# EAGLE board orph_cryptostick-0v1-all (EAGLE 6.6.0), part 1 of 3
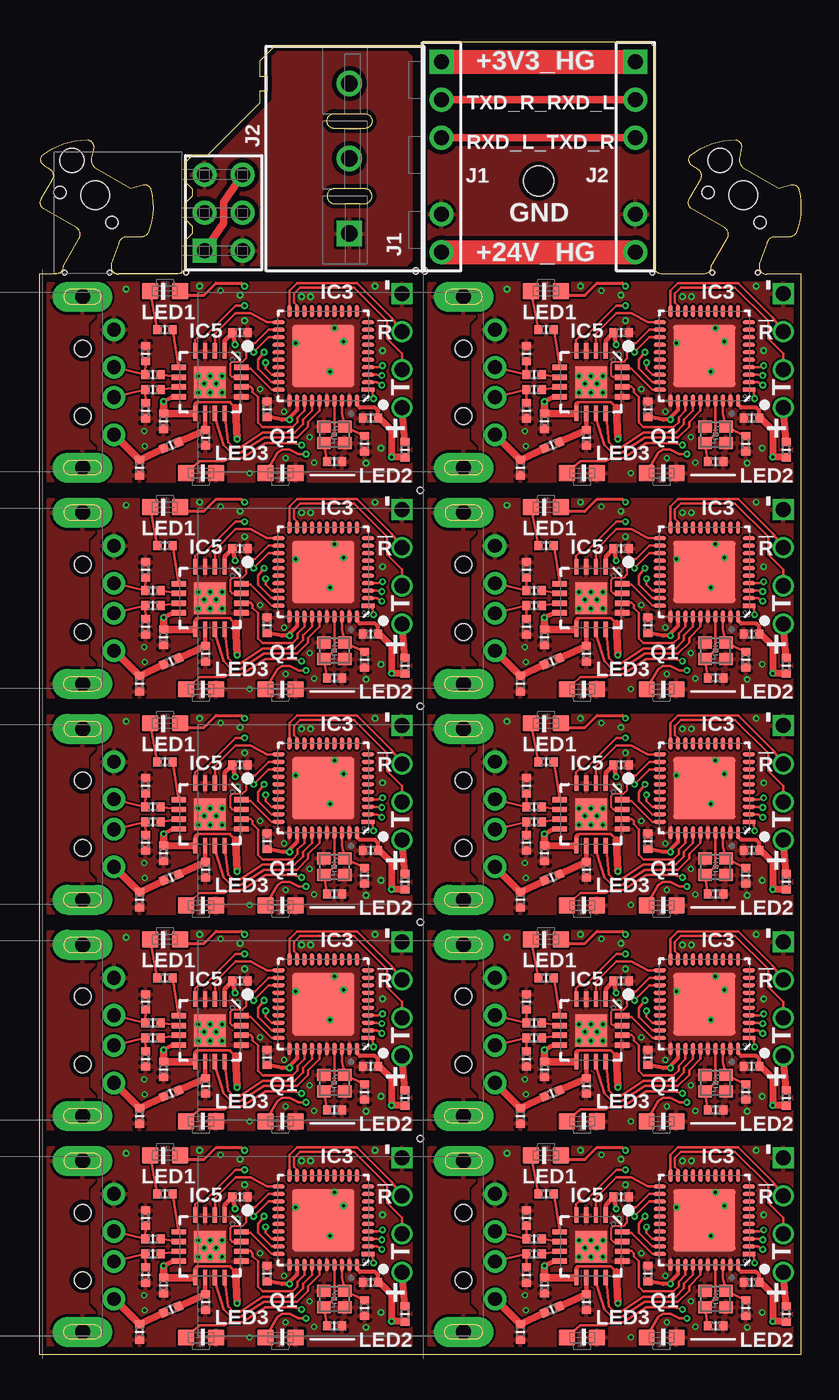
[diagram p0: board, top side]
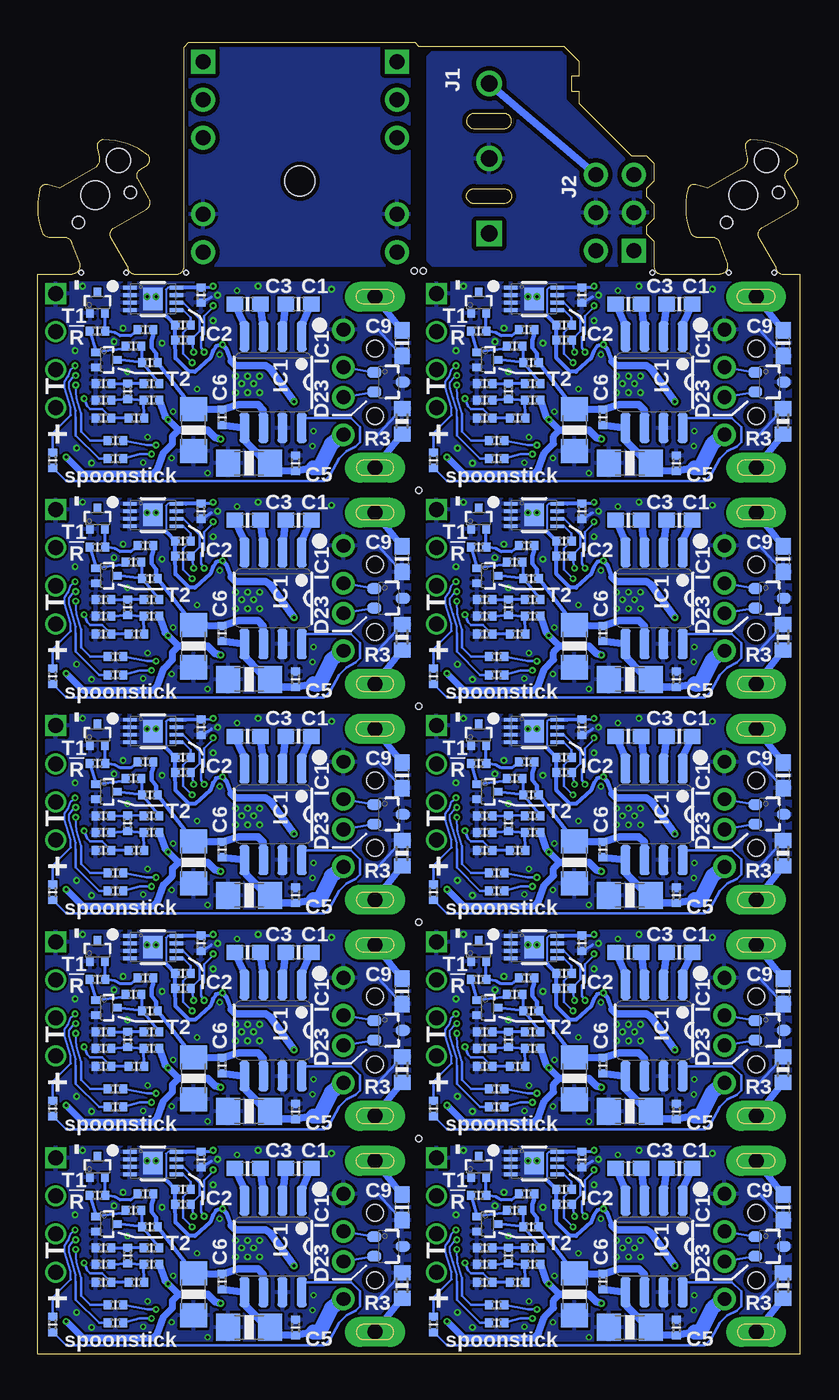
[diagram p1: board, bottom side, seen from below]

Size 50.8 x 87.44 mm. Coordinates in mm from the lower left corner, seen from the top.
Outline: 0,0 25.4,0 50.8,0 50.8,14.4 50.8,28.8 50.8,43.2 50.8,57.6 50.8,72 48.5,72 arc-90 48,72.5 48,72.7 48.51,74.04 arc-75 49.05,74.48 49.97,74.47 arc60 50.48,74.75 arc35 50.65,77.65 arc90 50.13,77.95 49.31,77.73 46.89,79.13 arc-60 46.7,79.82 46.83,80.44 arc90 46.44,80.95 arc40 43.39,79.88 arc90 43.58,79.2 43.92,79 arc-90 44.1,78.31 43.35,77.02 arc90 43.54,76.33 45.7,75.08 arc-90 45.89,74.4 44.8,72.5 arc-90 44.3,72 41.53,72 arc-90 41.03,72.5 41.03,87.12 40.71,87.44 25.64,87.44 25.4,87.2 15.7,87.2 14.7,86.2 14.7,85.2 15.2,85.2 15.2,84.2 14.7,84.2 14.7,83.4 11.2,79.9 10.2,79.9 9.7,79.4 9.7,78.2 10.2,77.7 10.2,77.2 9.7,76.7 9.7,75.7 10.2,75.2 10.2,74.7 9.7,74.2 9.7,72.5 arc-90 9.2,72 5.3,72 arc-90 4.8,72.5 4.8,72.7 5.31,74.04 arc-75 5.85,74.48 6.77,74.47 arc60 7.28,74.75 arc35 7.45,77.65 arc90 6.93,77.95 6.11,77.73 3.69,79.13 arc-60 3.5,79.82 3.63,80.44 arc90 3.24,80.95 arc40 0.19,79.88 arc90 0.38,79.2 0.72,79 arc-90 0.9,78.31 0.15,77.02 arc90 0.34,76.33 2.5,75.08 arc-90 2.69,74.4 1.6,72.5 arc-90 1.1,72 0,72 0,57.6 0,43.2 0,28.8 0,14.4 0,0
Outline: 21.7,76.7 arc180 21.7,77.7 19.7,77.7 arc180 19.7,76.7 21.7,76.7
Outline: 21.7,81.7 19.7,81.7 arc-180 19.7,82.7 21.7,82.7 arc-180 21.7,81.7
Copper layers (1*16): Top 0.035mm / dielectric 1.5mm / Bottom 0.035mm
Design rules "PCB-POOL HighSpec *": minimum track width 0.125mm, minimum drill 0.2mm, track to track 0.125mm, track to pad 0.125mm, pad to pad 0.125mm, via to via 0.125mm, smd to smd 0.125mm, copper to edge 0.3mm, drill to drill 0.2mm, minimum pad ring 0.2mm, minimum via ring 0.1mm, stop-mask expansion 0.075mm, vias tented up to drill 0mil, thermal gap 0.2mm
Holes 1.9 mm at 46.95,77.25 3.75,77.25
Holes 1.6 mm at 45.41,79.58 2.21,79.58
Holes 0.8 mm at 44.59,77.46 48.05,75.46 1.39,77.46 4.85,75.46
Holes 2 mm at 33.3,78.2
Holes 0.3 mm at 40.9,72.1 9.8,72.1 44.9,72.1 47.9,72.1 1.7,72.1 4.7,72.1
Holes 0.4 mm at 25.1,72.2 25.7,72.2 25.4,57.6 25.4,43.2 25.4,28.8 25.4,14.4

## Footprints (pad centres in the part's own frame; a part is rotated, then mirrored left to right if it is on the bottom)
C0603 = smd 1.1 x 1: 1 -0.85,0; 2 0.85,0
R0402-MCU = smd 0.54 x 0.6: 1 -0.51,0; 2 0.51,0
C1206 = smd 1.6 x 1.8: 1 -1.4,0; 2 1.4,0
SC70-3 = smd 0.7 x 0.9: 1 -0.65,-0.95; 2 0.65,-0.95; 3 0,0.95
8SOIC-2 = smd 0.66 x 2: 1 -1.905,-3.05; 2 -0.635,-3.05; 3 0.635,-3.05; 4 1.905,-3.05; 5 1.905,3.05; 6 0.635,3.05; 7 -0.635,3.05; 8 -1.905,3.05
8UDFN = smd 0.9 x 0.25: 1 -1.55,0.75; 2 -1.55,0.25; 3 -1.55,-0.25; 4 -1.55,-0.75; 5 1.55,-0.75; 6 1.55,-0.25; 7 1.55,0.25; 8 1.55,0.75 | smd 1.3 x 1.5: EP 0,0
40VQFN-MSP430FR5959 = smd 0.85 x 0.28: 1 -2.975,2.25; 2 -2.975,1.75; 3 -2.975,1.25; 4 -2.975,0.75; 5 -2.975,0.25; 6 -2.975,-0.25; 7 -2.975,-0.75; 8 -2.975,-1.25; 9 -2.975,-1.75; 10 -2.975,-2.25; 21 2.975,-2.25; 22 2.975,-1.75; 23 2.975,-1.25; 24 2.975,-0.75; 25 2.975,-0.25; 26 2.975,0.25; 27 2.975,0.75; 28 2.975,1.25; 29 2.975,1.75; 30 2.975,2.25 | smd 0.28 x 0.85: 11 -2.25,-2.975; 12 -1.75,-2.975; 13 -1.25,-2.975; 14 -0.75,-2.975; 15 -0.25,-2.975; 16 0.25,-2.975; 17 0.75,-2.975; 18 1.25,-2.975; 19 1.75,-2.975; 20 2.25,-2.975; 31 2.25,2.975; 32 1.75,2.975; 33 1.25,2.975; 34 0.75,2.975; 35 0.25,2.975; 36 -0.25,2.975; 37 -0.75,2.975; 38 -1.25,2.975; 39 -1.75,2.975; 40 -2.25,2.975 | smd 4.15 x 4.15: EP 0,0
16QFN-FT230X = smd 1 x 0.325: 1 -2.08,0.975; 2 -2.08,0.325; 3 -2.08,-0.325; 4 -2.08,-0.975; 9 2.08,-0.975; 10 2.08,-0.325; 11 2.08,0.325; 12 2.08,0.975 | smd 0.325 x 1: 5 -0.975,-2.08; 6 -0.325,-2.08; 7 0.325,-2.08; 8 0.975,-2.08; 13 0.975,2.08; 14 0.325,2.08; 15 -0.325,2.08; 16 -0.975,2.08 | smd 2.1 x 2.1: EP 0,0
USB-A-ST = drill 0.92 pad 1.5: 1 3.5,4.8; 2 1,4.8; 3 -1,4.8; 4 -3.5,4.8 | drill 1 pad 2 long: SH1 5.7,2.7; SH2 -5.7,2.7 | hole 1.1: -2.25,2.7; 2.25,2.7
KLEMME-FEDER-5MM-3POS = drill 1.1 pad 1.7 square: 1 -5,-0.3 | drill 1.1 pad 1.7: 2 0,-0.3; 3 5,-0.3
FE04-1 = drill 1 pad 1.4 square: 1 -3.81,0 | drill 1 pad 1.4: 2 -1.27,0; 3 1.27,0; 4 3.81,0
FE03-2-R/A = drill 1 pad 1.6 square: 1 1.27,2.54 | drill 1 pad 1.6: 2 -1.27,2.54; 3 1.27,0; 4 -1.27,0; 5 1.27,-2.54; 6 -1.27,-2.54
MA06-1-KEY = drill 1 pad 1.6 square: 1 0,6.35 | drill 1 pad 1.6: 2 0,3.81; 3 0,1.27; 5 0,-3.81; 6 0,-6.35
0603-SIDELED-RPI = smd 1.1 x 1.1: A -1,0.235; C 1,0.235
XTAL-30MHZ-2.0X1.6 = smd 0.9 x 0.8: 1 -0.7,-0.55; 2 0.7,-0.55; 3 0.7,0.55; 4 -0.7,0.55
R0603 = smd 1 x 1.1: 1 -0.85,0; 2 0.85,0
SOT523 = smd 0.5 x 0.61: 1 -0.5,-0.7; 2 0.5,-0.7; 3 0,0.7

## Placement (x,y rotation side)
C1  0u22  [C0603]  8,12.4 180 bottom
C2  0u1  [R0402-MCU]  14.5,13 270 bottom
C3  0u22  [C0603]  11.4,12.4 180 bottom
C4  0u1  [R0402-MCU]  13.1,4.85 270 bottom
C5  10u/1206  [C1206]  11.3,1.8 180 bottom
C6  10u/1206  [C1206]  15,4 270 bottom
C7  0u1  [R0402-MCU]  8.2,1.8 90 bottom
C8  22p  [R0402-MCU]  19.7,1.9 180 top
C9  10n_nm  [C0603]  1.1,9.8 90 bottom
C10  0u1  [R0402-MCU]  15.2,5.4 90 top
C11  22p  [R0402-MCU]  21.7,3.1 90 top
C12  0u1  [R0402-MCU]  22.1,4.8 180 top
C13  10n  [R0402-MCU]  6.7,1.5 270 top
C14  47p  [R0402-MCU]  7.1,23.5 90 top
C15  47p  [R0402-MCU]  7.1,19.7 270 top
C16  0u1  [R0402-MCU]  11.1,17.9 270 top
C17  0u1  [R0402-MCU]  8.3,19 270 top
C18  0u1  [R0402-MCU]  13.4,24.9 0 top
C19  0u1  [R0402-MCU]  14.5,27.4 270 bottom
C20  0u1  [R0402-MCU]  21.4,25 0 bottom
C21  0u1  [R0402-MCU]  19.4,21 90 bottom
C22  100p  [R0402-MCU]  21,19.2 180 bottom
C23  0u22  [C0603]  8,26.8 180 bottom
C24  0u22  [C0603]  11.4,26.8 180 bottom
C25  0u1  [R0402-MCU]  13.1,19.25 270 bottom
C26  10u/1206  [C1206]  11.3,16.2 180 bottom
C27  10u/1206  [C1206]  15,18.4 270 bottom
C28  0u1  [R0402-MCU]  8.2,16.2 90 bottom
C29  22p  [R0402-MCU]  19.7,16.3 180 top
C30  0u1  [R0402-MCU]  19.4,6.6 90 bottom
C31  0u1  [R0402-MCU]  21.4,10.6 0 bottom
C32  100p  [R0402-MCU]  21,4.8 180 bottom
C33  0u1  [R0402-MCU]  22.1,19.2 180 top
C34  0u1  [R0402-MCU]  15.2,19.8 90 top
C35  22p  [R0402-MCU]  21.7,17.5 90 top
C36  10n_nm  [C0603]  1.1,24.2 90 bottom
C37  10n  [R0402-MCU]  6.7,15.9 270 top
C38  47p  [R0402-MCU]  7.1,37.9 90 top
C39  47p  [R0402-MCU]  7.1,34.1 270 top
C40  0u1  [R0402-MCU]  11.1,32.3 270 top
C41  0u1  [R0402-MCU]  8.3,33.4 270 top
C42  0u1  [R0402-MCU]  13.4,39.3 0 top
C43  0u1  [R0402-MCU]  14.5,41.8 270 bottom
C44  0u1  [R0402-MCU]  21.4,39.4 0 bottom
C45  0u1  [R0402-MCU]  19.4,35.4 90 bottom
C46  100p  [R0402-MCU]  21,33.6 180 bottom
C47  0u22  [C0603]  8,41.2 180 bottom
C48  0u22  [C0603]  11.4,41.2 180 bottom
C49  0u1  [R0402-MCU]  13.1,33.65 270 bottom
C50  10u/1206  [C1206]  11.3,30.6 180 bottom
C51  10u/1206  [C1206]  15,32.8 270 bottom
C52  0u1  [R0402-MCU]  8.2,30.6 90 bottom
C53  22p  [R0402-MCU]  19.7,30.7 180 top
C54  0u1  [R0402-MCU]  22.1,33.6 180 top
C55  0u1  [R0402-MCU]  15.2,34.2 90 top
C56  22p  [R0402-MCU]  21.7,31.9 90 top
C57  10n_nm  [C0603]  1.1,38.6 90 bottom
C58  10n  [R0402-MCU]  6.7,30.3 270 top
C59  47p  [R0402-MCU]  7.1,52.3 90 top
C60  47p  [R0402-MCU]  7.1,48.5 270 top
C61  0u1  [R0402-MCU]  11.1,46.7 270 top
C62  0u1  [R0402-MCU]  8.3,47.8 270 top
C63  0u1  [R0402-MCU]  13.4,53.7 0 top
C64  0u1  [R0402-MCU]  14.5,56.2 270 bottom
C65  0u1  [R0402-MCU]  21.4,53.8 0 bottom
C66  0u1  [R0402-MCU]  19.4,49.8 90 bottom
C67  100p  [R0402-MCU]  21,48 180 bottom
C68  0u22  [C0603]  8,55.6 180 bottom
C69  0u22  [C0603]  11.4,55.6 180 bottom
C70  0u1  [R0402-MCU]  13.1,48.05 270 bottom
C71  10u/1206  [C1206]  11.3,45 180 bottom
C72  10u/1206  [C1206]  15,47.2 270 bottom
C73  0u1  [R0402-MCU]  8.2,45 90 bottom
C74  22p  [R0402-MCU]  19.7,45.1 180 top
C75  0u1  [R0402-MCU]  22.1,48 180 top
C76  0u1  [R0402-MCU]  15.2,48.6 90 top
C77  22p  [R0402-MCU]  21.7,46.3 90 top
C78  10n_nm  [C0603]  1.1,53 90 bottom
C79  10n  [R0402-MCU]  6.7,44.7 270 top
C80  47p  [R0402-MCU]  7.1,66.7 90 top
C81  47p  [R0402-MCU]  7.1,62.9 270 top
C82  0u1  [R0402-MCU]  11.1,61.1 270 top
C83  0u1  [R0402-MCU]  8.3,62.2 270 top
C84  0u1  [R0402-MCU]  13.4,68.1 0 top
C85  0u1  [R0402-MCU]  14.5,70.6 270 bottom
C86  0u1  [R0402-MCU]  21.4,68.2 0 bottom
C87  0u1  [R0402-MCU]  19.4,64.2 90 bottom
C88  100p  [R0402-MCU]  21,62.4 180 bottom
C89  0u22  [C0603]  8,70 180 bottom
C90  47p  [R0402-MCU]  7.1,5.3 270 top
C91  47p  [R0402-MCU]  7.1,9.1 90 top
C92  0u1  [R0402-MCU]  11.1,3.5 270 top
C93  0u1  [R0402-MCU]  8.3,4.6 270 top
C94  0u1  [R0402-MCU]  13.4,10.5 0 top
C95  0u22  [C0603]  11.4,70 180 bottom
C96  0u1  [R0402-MCU]  13.1,62.45 270 bottom
C97  10u/1206  [C1206]  11.3,59.4 180 bottom
C98  10u/1206  [C1206]  15,61.6 270 bottom
C99  0u1  [R0402-MCU]  8.2,59.4 90 bottom
C100  22p  [R0402-MCU]  19.7,59.5 180 top
C101  0u1  [R0402-MCU]  22.1,62.4 180 top
C102  0u1  [R0402-MCU]  15.2,63 90 top
C103  22p  [R0402-MCU]  21.7,60.7 90 top
C104  10n_nm  [C0603]  1.1,67.4 90 bottom
C105  10n  [R0402-MCU]  6.7,59.1 270 top
C106  47p  [R0402-MCU]  32.5,9.1 90 top
C107  47p  [R0402-MCU]  32.5,5.3 270 top
C108  0u1  [R0402-MCU]  36.5,3.5 270 top
C109  0u1  [R0402-MCU]  33.7,4.6 270 top
C110  0u1  [R0402-MCU]  38.8,10.5 0 top
C111  0u1  [R0402-MCU]  39.9,13 270 bottom
C112  0u1  [R0402-MCU]  46.8,10.6 0 bottom
C113  0u1  [R0402-MCU]  44.8,6.6 90 bottom
C114  100p  [R0402-MCU]  46.4,4.8 180 bottom
C115  0u22  [C0603]  33.4,12.4 180 bottom
C116  0u22  [C0603]  36.8,12.4 180 bottom
C117  0u1  [R0402-MCU]  38.5,4.85 270 bottom
C118  10u/1206  [C1206]  36.7,1.8 180 bottom
C119  10u/1206  [C1206]  40.4,4 270 bottom
C120  0u1  [R0402-MCU]  33.6,1.8 90 bottom
C121  22p  [R0402-MCU]  45.1,1.9 180 top
C122  0u1  [R0402-MCU]  47.5,4.8 180 top
C123  0u1  [R0402-MCU]  40.6,5.4 90 top
C124  22p  [R0402-MCU]  47.1,3.1 90 top
C125  10n_nm  [C0603]  26.5,9.8 90 bottom
C126  10n  [R0402-MCU]  32.1,1.5 270 top
C127  47p  [R0402-MCU]  32.5,23.5 90 top
C128  47p  [R0402-MCU]  32.5,19.7 270 top
C129  0u1  [R0402-MCU]  36.5,17.9 270 top
C130  0u1  [R0402-MCU]  33.7,19 270 top
C131  0u1  [R0402-MCU]  38.8,24.9 0 top
C132  0u1  [R0402-MCU]  39.9,27.4 270 bottom
C133  0u1  [R0402-MCU]  46.8,25 0 bottom
C134  0u1  [R0402-MCU]  44.8,21 90 bottom
C135  100p  [R0402-MCU]  46.4,19.2 180 bottom
C136  0u22  [C0603]  33.4,26.8 180 bottom
C137  0u22  [C0603]  36.8,26.8 180 bottom
C138  0u1  [R0402-MCU]  38.5,19.25 270 bottom
C139  10u/1206  [C1206]  36.7,16.2 180 bottom
C140  10u/1206  [C1206]  40.4,18.4 270 bottom
C141  0u1  [R0402-MCU]  33.6,16.2 90 bottom
C142  22p  [R0402-MCU]  45.1,16.3 180 top
C143  0u1  [R0402-MCU]  47.5,19.2 180 top
C144  0u1  [R0402-MCU]  40.6,19.8 90 top
C145  22p  [R0402-MCU]  47.1,17.5 90 top
C146  10n_nm  [C0603]  26.5,24.2 90 bottom
C147  10n  [R0402-MCU]  32.1,15.9 270 top
C148  47p  [R0402-MCU]  32.5,37.9 90 top
C149  47p  [R0402-MCU]  32.5,34.1 270 top
C150  0u1  [R0402-MCU]  36.5,32.3 270 top
C151  0u1  [R0402-MCU]  33.7,33.4 270 top
C152  0u1  [R0402-MCU]  38.8,39.3 0 top
C153  0u1  [R0402-MCU]  39.9,41.8 270 bottom
C154  0u1  [R0402-MCU]  46.8,39.4 0 bottom
C155  0u1  [R0402-MCU]  44.8,35.4 90 bottom
C156  100p  [R0402-MCU]  46.4,33.6 180 bottom
C157  0u22  [C0603]  33.4,41.2 180 bottom
C158  0u22  [C0603]  36.8,41.2 180 bottom
C159  0u1  [R0402-MCU]  38.5,33.65 270 bottom
C160  10u/1206  [C1206]  36.7,30.6 180 bottom
C161  10u/1206  [C1206]  40.4,32.8 270 bottom
C162  0u1  [R0402-MCU]  33.6,30.6 90 bottom
C163  22p  [R0402-MCU]  45.1,30.7 180 top
C164  0u1  [R0402-MCU]  47.5,33.6 180 top
C165  0u1  [R0402-MCU]  40.6,34.2 90 top
C166  22p  [R0402-MCU]  47.1,31.9 90 top
C167  10n_nm  [C0603]  26.5,38.6 90 bottom
C168  10n  [R0402-MCU]  32.1,30.3 270 top
C169  47p  [R0402-MCU]  32.5,52.3 90 top
C170  47p  [R0402-MCU]  32.5,48.5 270 top
C171  0u1  [R0402-MCU]  36.5,46.7 270 top
C172  0u1  [R0402-MCU]  33.7,47.8 270 top
C173  0u1  [R0402-MCU]  38.8,53.7 0 top
C174  0u1  [R0402-MCU]  39.9,56.2 270 bottom
C175  0u1  [R0402-MCU]  46.8,53.8 0 bottom
C176  0u1  [R0402-MCU]  44.8,49.8 90 bottom
C177  100p  [R0402-MCU]  46.4,48 180 bottom
C178  0u22  [C0603]  33.4,55.6 180 bottom
C179  0u22  [C0603]  36.8,55.6 180 bottom
C180  0u1  [R0402-MCU]  38.5,48.05 270 bottom
C181  10u/1206  [C1206]  36.7,45 180 bottom
C182  10u/1206  [C1206]  40.4,47.2 270 bottom
C183  0u1  [R0402-MCU]  33.6,45 90 bottom
C184  22p  [R0402-MCU]  45.1,45.1 180 top
C185  0u1  [R0402-MCU]  47.5,48 180 top
C186  0u1  [R0402-MCU]  40.6,48.6 90 top
C187  22p  [R0402-MCU]  47.1,46.3 90 top
C188  10n_nm  [C0603]  26.5,53 90 bottom
C189  10n  [R0402-MCU]  32.1,44.7 270 top
C190  47p  [R0402-MCU]  32.5,66.7 90 top
C191  47p  [R0402-MCU]  32.5,62.9 270 top
C192  0u1  [R0402-MCU]  36.5,61.1 270 top
C193  0u1  [R0402-MCU]  33.7,62.2 270 top
C194  0u1  [R0402-MCU]  38.8,68.1 0 top
C195  0u1  [R0402-MCU]  39.9,70.6 270 bottom
C196  0u1  [R0402-MCU]  46.8,68.2 0 bottom
C197  0u1  [R0402-MCU]  44.8,64.2 90 bottom
C198  100p  [R0402-MCU]  46.4,62.4 180 bottom
C199  0u22  [C0603]  33.4,70 180 bottom
C200  0u22  [C0603]  36.8,70 180 bottom
C201  0u1  [R0402-MCU]  38.5,62.45 270 bottom
C202  10u/1206  [C1206]  36.7,59.4 180 bottom
C203  10u/1206  [C1206]  40.4,61.6 270 bottom
C204  0u1  [R0402-MCU]  33.6,59.4 90 bottom
C205  22p  [R0402-MCU]  45.1,59.5 180 top
C206  0u1  [R0402-MCU]  47.5,62.4 180 top
C207  0u1  [R0402-MCU]  40.6,63 90 top
C208  22p  [R0402-MCU]  47.1,60.7 90 top
C209  10n_nm  [C0603]  26.5,67.4 90 bottom
C210  10n  [R0402-MCU]  32.1,59.1 270 top
D1  TVS-ESD7002  [SC70-3]  2,21.6 270 bottom
D2  TVS-ESD7002  [SC70-3]  2,36 270 bottom
D3  TVS-ESD7002  [SC70-3]  2,50.4 270 bottom
D4  TVS-ESD7002  [SC70-3]  2,64.8 270 bottom
D5  TVS-ESD7002  [SC70-3]  27.4,7.2 270 bottom
D6  TVS-ESD7002  [SC70-3]  27.4,21.6 270 bottom
D7  TVS-ESD7002  [SC70-3]  27.4,36 270 bottom
D8  TVS-ESD7002  [SC70-3]  27.4,50.4 270 bottom
D9  TVS-ESD7002  [SC70-3]  27.4,64.8 270 bottom
D23  TVS-ESD7002  [SC70-3]  2,7.2 270 bottom
IC1  ST662-2  [8SOIC-2]  9.7,7.2 180 bottom
IC2  ATECC508A-UDFN  [8UDFN]  17.7,12.75 0 bottom
IC3  MSP430FR5959-40VQFN  [40VQFN-MSP430FR5959]  18.95,8.95 180 top
IC4  FT230XQ  [16QFN-FT230X]  11.4,21.6 270 top
IC5  FT230XQ  [16QFN-FT230X]  11.4,7.2 270 top
IC6  ATECC508A-UDFN  [8UDFN]  17.7,27.15 0 bottom
IC7  MSP430FR5959-40VQFN  [40VQFN-MSP430FR5959]  18.95,23.35 180 top
IC8  ST662-2  [8SOIC-2]  9.7,21.6 180 bottom
IC9  FT230XQ  [16QFN-FT230X]  11.4,36 270 top
IC10  ATECC508A-UDFN  [8UDFN]  17.7,41.55 0 bottom
IC11  MSP430FR5959-40VQFN  [40VQFN-MSP430FR5959]  18.95,37.75 180 top
IC12  ST662-2  [8SOIC-2]  9.7,36 180 bottom
IC13  FT230XQ  [16QFN-FT230X]  11.4,50.4 270 top
IC14  ATECC508A-UDFN  [8UDFN]  17.7,55.95 0 bottom
IC15  MSP430FR5959-40VQFN  [40VQFN-MSP430FR5959]  18.95,52.15 180 top
IC16  ST662-2  [8SOIC-2]  9.7,50.4 180 bottom
IC17  FT230XQ  [16QFN-FT230X]  11.4,64.8 270 top
IC18  ATECC508A-UDFN  [8UDFN]  17.7,70.35 0 bottom
IC19  MSP430FR5959-40VQFN  [40VQFN-MSP430FR5959]  18.95,66.55 180 top
IC20  ST662-2  [8SOIC-2]  9.7,64.8 180 bottom
IC21  FT230XQ  [16QFN-FT230X]  36.8,7.2 270 top
IC22  ATECC508A-UDFN  [8UDFN]  43.1,12.75 0 bottom
IC23  MSP430FR5959-40VQFN  [40VQFN-MSP430FR5959]  44.35,8.95 180 top
IC24  ST662-2  [8SOIC-2]  35.1,7.2 180 bottom
IC25  FT230XQ  [16QFN-FT230X]  36.8,21.6 270 top
IC26  ATECC508A-UDFN  [8UDFN]  43.1,27.15 0 bottom
IC27  MSP430FR5959-40VQFN  [40VQFN-MSP430FR5959]  44.35,23.35 180 top
IC28  ST662-2  [8SOIC-2]  35.1,21.6 180 bottom
IC29  FT230XQ  [16QFN-FT230X]  36.8,36 270 top
IC30  ATECC508A-UDFN  [8UDFN]  43.1,41.55 0 bottom
IC31  MSP430FR5959-40VQFN  [40VQFN-MSP430FR5959]  44.35,37.75 180 top
IC32  ST662-2  [8SOIC-2]  35.1,36 180 bottom
IC33  FT230XQ  [16QFN-FT230X]  36.8,50.4 270 top
IC34  ATECC508A-UDFN  [8UDFN]  43.1,55.95 0 bottom
IC35  MSP430FR5959-40VQFN  [40VQFN-MSP430FR5959]  44.35,52.15 180 top
IC36  ST662-2  [8SOIC-2]  35.1,50.4 180 bottom
IC37  FT230XQ  [16QFN-FT230X]  36.8,64.8 270 top
IC38  ATECC508A-UDFN  [8UDFN]  43.1,70.35 0 bottom
IC39  MSP430FR5959-40VQFN  [40VQFN-MSP430FR5959]  44.35,66.55 180 top
IC40  ST662-2  [8SOIC-2]  35.1,64.8 180 bottom
J1  USB-A-ST  [USB-A-ST]  0.2,7.2 270 top
J2  KLEMME-3POS-FEDER-5MM  [KLEMME-FEDER-5MM-3POS]  20.4,79.7 90 top
J3  FE04-1  [FE04-1]  24.2,9.3 270 top
J4  FE03-2  [FE03-2-R/A]  12.3,76.09 180 top
J5  MA06-1-KEY  [MA06-1-KEY]  26.84,79.82 0 top
J6  MA06-1-KEY  [MA06-1-KEY]  39.76,79.82 0 top
J7  USB-A-ST  [USB-A-ST]  0.2,21.6 270 top
J8  FE04-1  [FE04-1]  24.2,23.7 270 top
J9  USB-A-ST  [USB-A-ST]  0.2,36 270 top
J10  FE04-1  [FE04-1]  24.2,38.1 270 top
J11  USB-A-ST  [USB-A-ST]  0.2,50.4 270 top
J12  FE04-1  [FE04-1]  24.2,52.5 270 top
J13  USB-A-ST  [USB-A-ST]  0.2,64.8 270 top
J14  FE04-1  [FE04-1]  24.2,66.9 270 top
J15  USB-A-ST  [USB-A-ST]  25.6,7.2 270 top
J16  FE04-1  [FE04-1]  49.6,9.3 270 top
J17  USB-A-ST  [USB-A-ST]  25.6,21.6 270 top
J18  FE04-1  [FE04-1]  49.6,23.7 270 top
J19  USB-A-ST  [USB-A-ST]  25.6,36 270 top
J20  FE04-1  [FE04-1]  49.6,38.1 270 top
J21  USB-A-ST  [USB-A-ST]  25.6,50.4 270 top
J22  FE04-1  [FE04-1]  49.6,52.5 270 top
J23  USB-A-ST  [USB-A-ST]  25.6,64.8 270 top
J24  FE04-1  [FE04-1]  49.6,66.9 270 top
L1  [R0402-MCU]  8.8,3 22.5 top
L2  [R0402-MCU]  8.8,17.4 22.5 top
L3  [R0402-MCU]  8.8,31.8 22.5 top
L4  [R0402-MCU]  8.8,46.2 22.5 top
L5  [R0402-MCU]  8.8,60.6 22.5 top
L6  [R0402-MCU]  34.2,3 22.5 top
L7  [R0402-MCU]  34.2,17.4 22.5 top
L8  [R0402-MCU]  34.2,31.8 22.5 top
L9  [R0402-MCU]  34.2,46.2 22.5 top
L10  [R0402-MCU]  34.2,60.6 22.5 top
LED1  green  [0603-SIDELED-RPI]  8.4,13.5 180 top
LED2  green  [0603-SIDELED-RPI]  16.1,0.9 0 top
LED3  orange  [0603-SIDELED-RPI]  10.8,0.9 0 top
LED4  green  [0603-SIDELED-RPI]  8.4,27.9 180 top
LED5  green  [0603-SIDELED-RPI]  16.1,15.3 0 top
LED6  orange  [0603-SIDELED-RPI]  10.8,15.3 0 top
LED7  green  [0603-SIDELED-RPI]  8.4,42.3 180 top
LED8  green  [0603-SIDELED-RPI]  16.1,29.7 0 top
LED9  orange  [0603-SIDELED-RPI]  10.8,29.7 0 top
LED10  green  [0603-SIDELED-RPI]  8.4,56.7 180 top
LED11  green  [0603-SIDELED-RPI]  16.1,44.1 0 top
LED12  orange  [0603-SIDELED-RPI]  10.8,44.1 0 top
LED13  green  [0603-SIDELED-RPI]  8.4,71.1 180 top
LED14  green  [0603-SIDELED-RPI]  16.1,58.5 0 top
LED15  orange  [0603-SIDELED-RPI]  10.8,58.5 0 top
LED16  green  [0603-SIDELED-RPI]  33.8,13.5 180 top
LED17  green  [0603-SIDELED-RPI]  41.5,0.9 0 top
LED18  orange  [0603-SIDELED-RPI]  36.2,0.9 0 top
LED19  green  [0603-SIDELED-RPI]  33.8,27.9 180 top
LED20  green  [0603-SIDELED-RPI]  41.5,15.3 0 top
LED21  orange  [0603-SIDELED-RPI]  36.2,15.3 0 top
LED22  green  [0603-SIDELED-RPI]  33.8,42.3 180 top
LED23  green  [0603-SIDELED-RPI]  41.5,29.7 0 top
LED24  orange  [0603-SIDELED-RPI]  36.2,29.7 0 top
LED25  green  [0603-SIDELED-RPI]  33.8,56.7 180 top
LED26  green  [0603-SIDELED-RPI]  41.5,44.1 0 top
LED27  orange  [0603-SIDELED-RPI]  36.2,44.1 0 top
LED28  green  [0603-SIDELED-RPI]  33.8,71.1 180 top
LED29  green  [0603-SIDELED-RPI]  41.5,58.5 0 top
LED30  orange  [0603-SIDELED-RPI]  36.2,58.5 0 top
Q1  [XTAL-30MHZ-2.0X1.6]  19.7,3.7 180 top
Q2  [XTAL-30MHZ-2.0X1.6]  19.7,18.1 180 top
Q3  [XTAL-30MHZ-2.0X1.6]  19.7,32.5 180 top
Q4  [XTAL-30MHZ-2.0X1.6]  19.7,46.9 180 top
Q5  [XTAL-30MHZ-2.0X1.6]  19.7,61.3 180 top
Q6  [XTAL-30MHZ-2.0X1.6]  45.1,3.7 180 top
Q7  [XTAL-30MHZ-2.0X1.6]  45.1,18.1 180 top
Q8  [XTAL-30MHZ-2.0X1.6]  45.1,32.5 180 top
Q9  [XTAL-30MHZ-2.0X1.6]  45.1,46.9 180 top
Q10  [XTAL-30MHZ-2.0X1.6]  45.1,61.3 180 top
R1  3k9  [R0402-MCU]  15.7,11 0 bottom
R2  4k7  [R0402-MCU]  24.4,2 90 bottom
R3  1M_nm  [R0603]  1.1,4.6 270 bottom
R4  3k9  [R0402-MCU]  15.7,10 0 bottom
R5  68  [R0402-MCU]  24.4,2.7 90 top
R6  1k  [R0402-MCU]  20.2,2.1 180 bottom
R7  1k  [R0402-MCU]  20.2,3.3 180 bottom
R8  27  [R0402-MCU]  7.6,21.1 180 top
R9  27  [R0402-MCU]  7.6,22.1 180 top
R10  1k  [R0402-MCU]  8.4,25.1 180 top
R11  3k9  [R0402-MCU]  15.7,25.4 0 bottom
R12  3k9  [R0402-MCU]  15.7,24.4 0 bottom
R13  100k  [R0402-MCU]  18.2,25.1 0 bottom
R14  1M  [R0402-MCU]  19,24 180 bottom
R15  10k  [R0402-MCU]  17.9,22.9 180 bottom
R16  33k  [R0402-MCU]  17.8,20.4 180 bottom
R17  33k  [R0402-MCU]  21,20.4 180 bottom
R18  33k  [R0402-MCU]  17.8,21.5 180 bottom
R19  10k  [R0402-MCU]  21,21.5 180 bottom
R20  33k  [R0402-MCU]  18.8,19.2 180 bottom
R21  4k7  [R0402-MCU]  24.4,16.4 90 bottom
R22  1M_nm  [R0603]  1.1,19 270 bottom
R23  68  [R0402-MCU]  24.4,17.1 90 top
R24  1k  [R0402-MCU]  20.2,16.5 180 bottom
R25  1k  [R0402-MCU]  20.2,17.7 180 bottom
R26  27  [R0402-MCU]  7.6,35.5 180 top
R27  27  [R0402-MCU]  7.6,36.5 180 top
R28  1k  [R0402-MCU]  8.4,39.5 180 top
R29  3k9  [R0402-MCU]  15.7,39.8 0 bottom
R30  3k9  [R0402-MCU]  15.7,38.8 0 bottom
R31  100k  [R0402-MCU]  18.2,39.5 0 bottom
R32  1M  [R0402-MCU]  19,38.4 180 bottom
R33  100k  [R0402-MCU]  18.2,10.7 0 bottom
R34  1M  [R0402-MCU]  19,9.6 180 bottom
R35  10k  [R0402-MCU]  17.9,8.5 180 bottom
R36  33k  [R0402-MCU]  17.8,6 180 bottom
R37  33k  [R0402-MCU]  21,6 180 bottom
R38  33k  [R0402-MCU]  17.8,7.1 180 bottom
R39  10k  [R0402-MCU]  21,7.1 180 bottom
R40  33k  [R0402-MCU]  18.8,4.8 180 bottom
R41  10k  [R0402-MCU]  17.9,37.3 180 bottom
R42  33k  [R0402-MCU]  17.8,34.8 180 bottom
R43  33k  [R0402-MCU]  21,34.8 180 bottom
R44  33k  [R0402-MCU]  17.8,35.9 180 bottom
R45  10k  [R0402-MCU]  21,35.9 180 bottom
R46  33k  [R0402-MCU]  18.8,33.6 180 bottom
R47  4k7  [R0402-MCU]  24.4,30.8 90 bottom
R48  1M_nm  [R0603]  1.1,33.4 270 bottom
R49  68  [R0402-MCU]  24.4,31.5 90 top
R50  1k  [R0402-MCU]  20.2,30.9 180 bottom
R51  1k  [R0402-MCU]  20.2,32.1 180 bottom
R52  27  [R0402-MCU]  7.6,49.9 180 top
R53  27  [R0402-MCU]  7.6,50.9 180 top
R54  1k  [R0402-MCU]  8.4,53.9 180 top
R55  3k9  [R0402-MCU]  15.7,54.2 0 bottom
R56  3k9  [R0402-MCU]  15.7,53.2 0 bottom
R57  100k  [R0402-MCU]  18.2,53.9 0 bottom
R58  1M  [R0402-MCU]  19,52.8 180 bottom
R59  10k  [R0402-MCU]  17.9,51.7 180 bottom
R60  33k  [R0402-MCU]  17.8,49.2 180 bottom
R61  33k  [R0402-MCU]  21,49.2 180 bottom
R62  33k  [R0402-MCU]  17.8,50.3 180 bottom
R63  10k  [R0402-MCU]  21,50.3 180 bottom
R64  33k  [R0402-MCU]  18.8,48 180 bottom
R65  4k7  [R0402-MCU]  24.4,45.2 90 bottom
R66  1M_nm  [R0603]  1.1,47.8 270 bottom
R67  68  [R0402-MCU]  24.4,45.9 90 top
R68  1k  [R0402-MCU]  20.2,45.3 180 bottom
R69  1k  [R0402-MCU]  20.2,46.5 180 bottom
R70  27  [R0402-MCU]  7.6,64.3 180 top
R71  27  [R0402-MCU]  7.6,65.3 180 top
R72  1k  [R0402-MCU]  8.4,68.3 180 top
R73  3k9  [R0402-MCU]  15.7,68.6 0 bottom
R74  27  [R0402-MCU]  7.6,7.7 180 top
R75  27  [R0402-MCU]  7.6,6.7 180 top
R76  1k  [R0402-MCU]  8.4,10.7 180 top
R77  3k9  [R0402-MCU]  15.7,67.6 0 bottom
R78  100k  [R0402-MCU]  18.2,68.3 0 bottom
R79  1M  [R0402-MCU]  19,67.2 180 bottom
R80  10k  [R0402-MCU]  17.9,66.1 180 bottom
R81  33k  [R0402-MCU]  17.8,63.6 180 bottom
R82  33k  [R0402-MCU]  21,63.6 180 bottom
R83  33k  [R0402-MCU]  17.8,64.7 180 bottom
R84  10k  [R0402-MCU]  21,64.7 180 bottom
R85  33k  [R0402-MCU]  18.8,62.4 180 bottom
R86  4k7  [R0402-MCU]  24.4,59.6 90 bottom
R87  1M_nm  [R0603]  1.1,62.2 270 bottom
R88  68  [R0402-MCU]  24.4,60.3 90 top
R89  1k  [R0402-MCU]  20.2,59.7 180 bottom
R90  1k  [R0402-MCU]  20.2,60.9 180 bottom
R91  27  [R0402-MCU]  33,6.7 180 top
R92  27  [R0402-MCU]  33,7.7 180 top
R93  1k  [R0402-MCU]  33.8,10.7 180 top
R94  3k9  [R0402-MCU]  41.1,11 0 bottom
R95  3k9  [R0402-MCU]  41.1,10 0 bottom
R96  100k  [R0402-MCU]  43.6,10.7 0 bottom
R97  1M  [R0402-MCU]  44.4,9.6 180 bottom
R98  10k  [R0402-MCU]  43.3,8.5 180 bottom
R99  33k  [R0402-MCU]  43.2,6 180 bottom
R100  33k  [R0402-MCU]  46.4,6 180 bottom
R101  33k  [R0402-MCU]  43.2,7.1 180 bottom
R102  10k  [R0402-MCU]  46.4,7.1 180 bottom
R103  33k  [R0402-MCU]  44.2,4.8 180 bottom
R104  4k7  [R0402-MCU]  49.8,2 90 bottom
R105  1M_nm  [R0603]  26.5,4.6 270 bottom
R106  68  [R0402-MCU]  49.8,2.7 90 top
R107  1k  [R0402-MCU]  45.6,2.1 180 bottom
R108  1k  [R0402-MCU]  45.6,3.3 180 bottom
R109  27  [R0402-MCU]  33,21.1 180 top
R110  27  [R0402-MCU]  33,22.1 180 top
R111  1k  [R0402-MCU]  33.8,25.1 180 top
R112  3k9  [R0402-MCU]  41.1,25.4 0 bottom
R113  3k9  [R0402-MCU]  41.1,24.4 0 bottom
R114  100k  [R0402-MCU]  43.6,25.1 0 bottom
R115  1M  [R0402-MCU]  44.4,24 180 bottom
R116  10k  [R0402-MCU]  43.3,22.9 180 bottom
R117  33k  [R0402-MCU]  43.2,20.4 180 bottom
R118  33k  [R0402-MCU]  46.4,20.4 180 bottom
R119  33k  [R0402-MCU]  43.2,21.5 180 bottom
R120  10k  [R0402-MCU]  46.4,21.5 180 bottom
R121  33k  [R0402-MCU]  44.2,19.2 180 bottom
R122  4k7  [R0402-MCU]  49.8,16.4 90 bottom
R123  1M_nm  [R0603]  26.5,19 270 bottom
R124  68  [R0402-MCU]  49.8,17.1 90 top
R125  1k  [R0402-MCU]  45.6,16.5 180 bottom
R126  1k  [R0402-MCU]  45.6,17.7 180 bottom
R127  27  [R0402-MCU]  33,35.5 180 top
R128  27  [R0402-MCU]  33,36.5 180 top
R129  1k  [R0402-MCU]  33.8,39.5 180 top
R130  3k9  [R0402-MCU]  41.1,39.8 0 bottom
R131  3k9  [R0402-MCU]  41.1,38.8 0 bottom
R132  100k  [R0402-MCU]  43.6,39.5 0 bottom
R133  1M  [R0402-MCU]  44.4,38.4 180 bottom
R134  10k  [R0402-MCU]  43.3,37.3 180 bottom
R135  33k  [R0402-MCU]  43.2,34.8 180 bottom
R136  33k  [R0402-MCU]  46.4,34.8 180 bottom
R137  33k  [R0402-MCU]  43.2,35.9 180 bottom
R138  10k  [R0402-MCU]  46.4,35.9 180 bottom
R139  33k  [R0402-MCU]  44.2,33.6 180 bottom
R140  4k7  [R0402-MCU]  49.8,30.8 90 bottom
R141  1M_nm  [R0603]  26.5,33.4 270 bottom
R142  68  [R0402-MCU]  49.8,31.5 90 top
R143  1k  [R0402-MCU]  45.6,30.9 180 bottom
R144  1k  [R0402-MCU]  45.6,32.1 180 bottom
R145  27  [R0402-MCU]  33,49.9 180 top
R146  27  [R0402-MCU]  33,50.9 180 top
R147  1k  [R0402-MCU]  33.8,53.9 180 top
R148  3k9  [R0402-MCU]  41.1,54.2 0 bottom
R149  3k9  [R0402-MCU]  41.1,53.2 0 bottom
R150  100k  [R0402-MCU]  43.6,53.9 0 bottom
R151  1M  [R0402-MCU]  44.4,52.8 180 bottom
R152  10k  [R0402-MCU]  43.3,51.7 180 bottom
R153  33k  [R0402-MCU]  43.2,49.2 180 bottom
R154  33k  [R0402-MCU]  46.4,49.2 180 bottom
R155  33k  [R0402-MCU]  43.2,50.3 180 bottom
R156  10k  [R0402-MCU]  46.4,50.3 180 bottom
R157  33k  [R0402-MCU]  44.2,48 180 bottom
R158  4k7  [R0402-MCU]  49.8,45.2 90 bottom
R159  1M_nm  [R0603]  26.5,47.8 270 bottom
R160  68  [R0402-MCU]  49.8,45.9 90 top
R161  1k  [R0402-MCU]  45.6,45.3 180 bottom
R162  1k  [R0402-MCU]  45.6,46.5 180 bottom
R163  27  [R0402-MCU]  33,64.3 180 top
R164  27  [R0402-MCU]  33,65.3 180 top
R165  1k  [R0402-MCU]  33.8,68.3 180 top
R166  3k9  [R0402-MCU]  41.1,68.6 0 bottom
R167  3k9  [R0402-MCU]  41.1,67.6 0 bottom
R168  100k  [R0402-MCU]  43.6,68.3 0 bottom
R169  1M  [R0402-MCU]  44.4,67.2 180 bottom
R170  10k  [R0402-MCU]  43.3,66.1 180 bottom
R171  33k  [R0402-MCU]  43.2,63.6 180 bottom
R172  33k  [R0402-MCU]  46.4,63.6 180 bottom
R173  33k  [R0402-MCU]  43.2,64.7 180 bottom
R174  10k  [R0402-MCU]  46.4,64.7 180 bottom
R175  33k  [R0402-MCU]  44.2,62.4 180 bottom
R176  4k7  [R0402-MCU]  49.8,59.6 90 bottom
R177  1M_nm  [R0603]  26.5,62.2 270 bottom
R178  68  [R0402-MCU]  49.8,60.3 90 top
R179  1k  [R0402-MCU]  45.6,59.7 180 bottom
R180  1k  [R0402-MCU]  45.6,60.9 180 bottom
T1  NPN-MMBT3904-SOT523  [SOT523]  21.4,12.5 0 bottom
T2  NPN-MMBT3904-SOT523  [SOT523]  20.8,8.7 270 bottom
T3  NPN-MMBT3904-SOT523  [SOT523]  21.4,26.9 0 bottom
T4  NPN-MMBT3904-SOT523  [SOT523]  20.8,23.1 270 bottom
T5  NPN-MMBT3904-SOT523  [SOT523]  21.4,41.3 0 bottom
T6  NPN-MMBT3904-SOT523  [SOT523]  20.8,37.5 270 bottom
T7  NPN-MMBT3904-SOT523  [SOT523]  21.4,55.7 0 bottom
T8  NPN-MMBT3904-SOT523  [SOT523]  20.8,51.9 270 bottom
T9  NPN-MMBT3904-SOT523  [SOT523]  21.4,70.1 0 bottom
T10  NPN-MMBT3904-SOT523  [SOT523]  20.8,66.3 270 bottom
T11  NPN-MMBT3904-SOT523  [SOT523]  46.8,12.5 0 bottom
T12  NPN-MMBT3904-SOT523  [SOT523]  46.2,8.7 270 bottom
T13  NPN-MMBT3904-SOT523  [SOT523]  46.8,26.9 0 bottom
T14  NPN-MMBT3904-SOT523  [SOT523]  46.2,23.1 270 bottom
T15  NPN-MMBT3904-SOT523  [SOT523]  46.8,41.3 0 bottom
T16  NPN-MMBT3904-SOT523  [SOT523]  46.2,37.5 270 bottom
T17  NPN-MMBT3904-SOT523  [SOT523]  46.8,55.7 0 bottom
T18  NPN-MMBT3904-SOT523  [SOT523]  46.2,51.9 270 bottom
T19  NPN-MMBT3904-SOT523  [SOT523]  46.8,70.1 0 bottom
T20  NPN-MMBT3904-SOT523  [SOT523]  46.2,66.3 270 bottom

## Library data of the parts
C1-C210 L1-L10 R1-R180 = rcl
D1-D9 D23 IC2 IC6 IC10 IC14 IC18 IC22 IC26 IC30 IC34 IC38 J4-J6 = hg-box
IC1 IC3 IC7 IC8 IC11 IC12 IC15 IC16 IC19 IC20 IC23 IC24 IC27 IC28 IC31 IC32 IC35 IC36 IC39 IC40 J3 J8 J10 J12 J14 J16 J18 J20 J22 J24 = cryptostick
IC4 IC5 IC9 IC13 IC17 IC21 IC25 IC29 IC33 IC37 J2 T1-T20 = bdsm
J1 J7 J9 J11 J13 J15 J17 J19 J21 J23 Q1-Q10 = cocs
LED1-LED30 = led

## Nets
0V: J2.2 J4.3 J4.4
+3V3_FTDI: C2.1 C10.1 C12.1 C93.1 C94.1 IC2.8 IC3.32 IC3.40 IC5.1 IC5.8 IC5.9 LED1.A R1.1 R4.1 R5.1 R36.1
+3V3_FTDI1: C17.1 C18.1 C19.1 C33.1 C34.1 IC4.1 IC4.8 IC4.9 IC6.8 IC7.32 IC7.40 LED4.A R11.1 R12.1 R16.1 R23.1
+3V3_FTDI2: C41.1 C42.1 C43.1 C54.1 C55.1 IC9.1 IC9.8 IC9.9 IC10.8 IC11.32 IC11.40 LED7.A R29.1 R30.1 R42.1 R49.1
+3V3_FTDI3: C62.1 C63.1 C64.1 C75.1 C76.1 IC13.1 IC13.8 IC13.9 IC14.8 IC15.32 IC15.40 LED10.A R55.1 R56.1 R60.1 R67.1
+3V3_FTDI4: C83.1 C84.1 C85.1 C101.1 C102.1 IC17.1 IC17.8 IC17.9 IC18.8 IC19.32 IC19.40 LED13.A R73.1 R77.1 R81.1 R88.1
+3V3_FTDI5: C109.1 C110.1 C111.1 C122.1 C123.1 IC21.1 IC21.8 IC21.9 IC22.8 IC23.32 IC23.40 LED16.A R94.1 R95.1 R99.1 R106.1
+3V3_FTDI6: C130.1 C131.1 C132.1 C143.1 C144.1 IC25.1 IC25.8 IC25.9 IC26.8 IC27.32 IC27.40 LED19.A R112.1 R113.1 R117.1 R124.1
+3V3_FTDI7: C151.1 C152.1 C153.1 C164.1 C165.1 IC29.1 IC29.8 IC29.9 IC30.8 IC31.32 IC31.40 LED22.A R130.1 R131.1 R135.1 R142.1
+3V3_FTDI8: C172.1 C173.1 C174.1 C185.1 C186.1 IC33.1 IC33.8 IC33.9 IC34.8 IC35.32 IC35.40 LED25.A R148.1 R149.1 R153.1 R160.1
+3V3_FTDI9: C193.1 C194.1 C195.1 C206.1 C207.1 IC37.1 IC37.8 IC37.9 IC38.8 IC39.32 IC39.40 LED28.A R166.1 R167.1 R171.1 R178.1
+3V3_HG: J5.1 J6.1
+5V_FTDI: C92.1 IC5.10 L1.2
+5V_FTDI1: C16.1 IC4.10 L2.2
+5V_FTDI2: C40.1 IC9.10 L3.2
+5V_FTDI3: C61.1 IC13.10 L4.2
+5V_FTDI4: C82.1 IC17.10 L5.2
+5V_FTDI5: C108.1 IC21.10 L6.2
+5V_FTDI6: C129.1 IC25.10 L7.2
+5V_FTDI7: C150.1 IC29.10 L8.2
+5V_FTDI8: C171.1 IC33.10 L9.2
+5V_FTDI9: C192.1 IC37.10 L10.2
+12V: C4.1 C6.1 IC1.6 R33.2 R35.1
+12V1: C25.1 C27.1 IC8.6 R13.2 R15.1
+12V2: C49.1 C51.1 IC12.6 R31.2 R41.1
+12V3: C70.1 C72.1 IC16.6 R57.2 R59.1
+12V4: C96.1 C98.1 IC20.6 R78.2 R80.1
+12V5: C117.1 C119.1 IC24.6 R96.2 R98.1
+12V6: C138.1 C140.1 IC28.6 R114.2 R116.1
+12V7: C159.1 C161.1 IC32.6 R132.2 R134.1
+12V8: C180.1 C182.1 IC36.6 R150.2 R152.1
+12V9: C201.1 C203.1 IC40.6 R168.2 R170.1
+24V: J2.1 J4.2 J4.5
+24V_HG: J5.6 J6.6
+VBUS: C4.2 C5.1 C7.1 C13.1 IC1.5 J1.1 L1.1
+VBUS1: C25.2 C26.1 C28.1 C37.1 IC8.5 J7.1 L2.1
+VBUS2: C49.2 C50.1 C52.1 C58.1 IC12.5 J9.1 L3.1
+VBUS3: C70.2 C71.1 C73.1 C79.1 IC16.5 J11.1 L4.1
+VBUS4: C96.2 C97.1 C99.1 C105.1 IC20.5 J13.1 L5.1
+VBUS5: C117.2 C118.1 C120.1 C126.1 IC24.5 J15.1 L6.1
+VBUS6: C138.2 C139.1 C141.1 C147.1 IC28.5 J17.1 L7.1
+VBUS7: C159.2 C160.1 C162.1 C168.1 IC32.5 J19.1 L8.1
+VBUS8: C180.2 C181.1 C183.1 C189.1 IC36.5 J21.1 L9.1
+VBUS9: C201.2 C202.1 C204.1 C210.1 IC40.5 J23.1 L10.1
CHARGEPUMP_SHDN: IC3.4 R2.2
CHARGEPUMP_SHDN1: IC7.4 R21.2
CHARGEPUMP_SHDN2: IC11.4 R47.2
CHARGEPUMP_SHDN3: IC15.4 R65.2
CHARGEPUMP_SHDN4: IC19.4 R86.2
CHARGEPUMP_SHDN5: IC23.4 R104.2
CHARGEPUMP_SHDN6: IC27.4 R122.2
CHARGEPUMP_SHDN7: IC31.4 R140.2
CHARGEPUMP_SHDN8: IC35.4 R158.2
CHARGEPUMP_SHDN9: IC39.4 R176.2
FTDI_CBUS0: IC3.34 IC5.12
FTDI_CBUS1: IC3.35 IC5.11
FTDI_CBUS2: IC4.11 IC7.35
FTDI_CBUS3: IC4.12 IC7.34
FTDI_CBUS4: IC9.11 IC11.35
FTDI_CBUS5: IC9.12 IC11.34
FTDI_CBUS6: IC13.11 IC15.35
FTDI_CBUS7: IC13.12 IC15.34
FTDI_CBUS8: IC17.11 IC19.35
FTDI_CBUS9: IC17.12 IC19.34
FTDI_CBUS10: IC21.11 IC23.35
FTDI_CBUS11: IC21.12 IC23.34
FTDI_CBUS12: IC25.11 IC27.35
FTDI_CBUS13: IC25.12 IC27.34
FTDI_CBUS14: IC29.11 IC31.35
FTDI_CBUS15: IC29.12 IC31.34
FTDI_CBUS16: IC33.11 IC35.35
FTDI_CBUS17: IC33.12 IC35.34
FTDI_CBUS18: IC37.11 IC39.35
FTDI_CBUS19: IC37.12 IC39.34
FTDI_CTS#: IC3.23 IC5.4
FTDI_CTS#1: IC4.4 IC7.23
FTDI_CTS#2: IC9.4 IC11.23
FTDI_CTS#3: IC13.4 IC15.23
FTDI_CTS#4: IC17.4 IC19.23
FTDI_CTS#5: IC21.4 IC23.23
FTDI_CTS#6: IC25.4 IC27.23
FTDI_CTS#7: IC29.4 IC31.23
FTDI_CTS#8: IC33.4 IC35.23
FTDI_CTS#9: IC37.4 IC39.23
FTDI_RTS#: IC3.30 IC5.16
FTDI_RTS#1: IC4.16 IC7.30
FTDI_RTS#2: IC9.16 IC11.30
FTDI_RTS#3: IC13.16 IC15.30
FTDI_RTS#4: IC17.16 IC19.30
FTDI_RTS#5: IC21.16 IC23.30
FTDI_RTS#6: IC25.16 IC27.30
FTDI_RTS#7: IC29.16 IC31.30
FTDI_RTS#8: IC33.16 IC35.30
FTDI_RTS#9: IC37.16 IC39.30
FTDI_RXD: IC3.21 IC5.2
FTDI_RXD1: IC4.2 IC7.21
FTDI_RXD2: IC9.2 IC11.21
FTDI_RXD3: IC13.2 IC15.21
FTDI_RXD4: IC17.2 IC19.21
FTDI_RXD5: IC21.2 IC23.21
FTDI_RXD6: IC25.2 IC27.21
FTDI_RXD7: IC29.2 IC31.21
FTDI_RXD8: IC33.2 IC35.21
FTDI_RXD9: IC37.2 IC39.21
FTDI_TXD: IC3.22 IC5.15
FTDI_TXD1: IC4.15 IC7.22
FTDI_TXD2: IC9.15 IC11.22
FTDI_TXD3: IC13.15 IC15.22
FTDI_TXD4: IC17.15 IC19.22
FTDI_TXD5: IC21.15 IC23.22
FTDI_TXD6: IC25.15 IC27.22
FTDI_TXD7: IC29.15 IC31.22
FTDI_TXD8: IC33.15 IC35.22
FTDI_TXD9: IC37.15 IC39.22
FTDI_TXLED#: IC5.5 R76.1
FTDI_TXLED#1: IC4.5 R10.1
FTDI_TXLED#2: IC9.5 R28.1
FTDI_TXLED#3: IC13.5 R54.1
FTDI_TXLED#4: IC17.5 R72.1
FTDI_TXLED#5: IC21.5 R93.1
FTDI_TXLED#6: IC25.5 R111.1
FTDI_TXLED#7: IC29.5 R129.1
FTDI_TXLED#8: IC33.5 R147.1
FTDI_TXLED#9: IC37.5 R165.1
GND: C2.2 C5.2 C6.2 C7.2 C8.1 C9.1 C10.2 C11.1 C12.2 C13.2 C32.2 C90.2 C91.2 C92.2 C93.2 C94.2 D23.3 IC1.7 IC2.1 IC2.2 IC2.3 IC2.4 IC2.7 IC2.EP IC3.31 IC3.36 IC3.39 IC3.EP IC5.3 IC5.13 IC5.EP J1.4 J3.1 LED2.C LED3.C Q1.2 Q1.4 R3.1 R37.2 R39.2 T1.1 T2.2
GND1: J5.5 J6.5
GND2: C14.2 C15.2 C16.2 C17.2 C18.2 C19.2 C22.2 C26.2 C27.2 C28.2 C29.1 C33.2 C34.2 C35.1 C36.1 C37.2 D1.3 IC4.3 IC4.13 IC4.EP IC6.1 IC6.2 IC6.3 IC6.4 IC6.7 IC6.EP IC7.31 IC7.36 IC7.39 IC7.EP IC8.7 J7.4 J8.1 LED5.C LED6.C Q2.2 Q2.4 R17.2 R19.2 R22.1 T3.1 T4.2
GND3: C38.2 C39.2 C40.2 C41.2 C42.2 C43.2 C46.2 C50.2 C51.2 C52.2 C53.1 C54.2 C55.2 C56.1 C57.1 C58.2 D2.3 IC9.3 IC9.13 IC9.EP IC10.1 IC10.2 IC10.3 IC10.4 IC10.7 IC10.EP IC11.31 IC11.36 IC11.39 IC11.EP IC12.7 J9.4 J10.1 LED8.C LED9.C Q3.2 Q3.4 R43.2 R45.2 R48.1 T5.1 T6.2
GND4: C59.2 C60.2 C61.2 C62.2 C63.2 C64.2 C67.2 C71.2 C72.2 C73.2 C74.1 C75.2 C76.2 C77.1 C78.1 C79.2 D3.3 IC13.3 IC13.13 IC13.EP IC14.1 IC14.2 IC14.3 IC14.4 IC14.7 IC14.EP IC15.31 IC15.36 IC15.39 IC15.EP IC16.7 J11.4 J12.1 LED11.C LED12.C Q4.2 Q4.4 R61.2 R63.2 R66.1 T7.1 T8.2
GND5: C80.2 C81.2 C82.2 C83.2 C84.2 C85.2 C88.2 C97.2 C98.2 C99.2 C100.1 C101.2 C102.2 C103.1 C104.1 C105.2 D4.3 IC17.3 IC17.13 IC17.EP IC18.1 IC18.2 IC18.3 IC18.4 IC18.7 IC18.EP IC19.31 IC19.36 IC19.39 IC19.EP IC20.7 J13.4 J14.1 LED14.C LED15.C Q5.2 Q5.4 R82.2 R84.2 R87.1 T9.1 T10.2
GND6: C106.2 C107.2 C108.2 C109.2 C110.2 C111.2 C114.2 C118.2 C119.2 C120.2 C121.1 C122.2 C123.2 C124.1 C125.1 C126.2 D5.3 IC21.3 IC21.13 IC21.EP IC22.1 IC22.2 IC22.3 IC22.4 IC22.7 IC22.EP IC23.31 IC23.36 IC23.39 IC23.EP IC24.7 J15.4 J16.1 LED17.C LED18.C Q6.2 Q6.4 R100.2 R102.2 R105.1 T11.1 T12.2
GND7: C127.2 C128.2 C129.2 C130.2 C131.2 C132.2 C135.2 C139.2 C140.2 C141.2 C142.1 C143.2 C144.2 C145.1 C146.1 C147.2 D6.3 IC25.3 IC25.13 IC25.EP IC26.1 IC26.2 IC26.3 IC26.4 IC26.7 IC26.EP IC27.31 IC27.36 IC27.39 IC27.EP IC28.7 J17.4 J18.1 LED20.C LED21.C Q7.2 Q7.4 R118.2 R120.2 R123.1 T13.1 T14.2
GND8: C148.2 C149.2 C150.2 C151.2 C152.2 C153.2 C156.2 C160.2 C161.2 C162.2 C163.1 C164.2 C165.2 C166.1 C167.1 C168.2 D7.3 IC29.3 IC29.13 IC29.EP IC30.1 IC30.2 IC30.3 IC30.4 IC30.7 IC30.EP IC31.31 IC31.36 IC31.39 IC31.EP IC32.7 J19.4 J20.1 LED23.C LED24.C Q8.2 Q8.4 R136.2 R138.2 R141.1 T15.1 T16.2
GND9: C169.2 C170.2 C171.2 C172.2 C173.2 C174.2 C177.2 C181.2 C182.2 C183.2 C184.1 C185.2 C186.2 C187.1 C188.1 C189.2 D8.3 IC33.3 IC33.13 IC33.EP IC34.1 IC34.2 IC34.3 IC34.4 IC34.7 IC34.EP IC35.31 IC35.36 IC35.39 IC35.EP IC36.7 J21.4 J22.1 LED26.C LED27.C Q9.2 Q9.4 R154.2 R156.2 R159.1 T17.1 T18.2
GND10: C190.2 C191.2 C192.2 C193.2 C194.2 C195.2 C198.2 C202.2 C203.2 C204.2 C205.1 C206.2 C207.2 C208.1 C209.1 C210.2 D9.3 IC37.3 IC37.13 IC37.EP IC38.1 IC38.2 IC38.3 IC38.4 IC38.7 IC38.EP IC39.31 IC39.36 IC39.39 IC39.EP IC40.7 J23.4 J24.1 LED29.C LED30.C Q10.2 Q10.4 R172.2 R174.2 R177.1 T19.1 T20.2
LED_GREEN: IC3.3 R6.2
LED_GREEN1: IC7.3 R24.2
LED_GREEN2: IC11.3 R50.2
LED_GREEN3: IC15.3 R68.2
LED_GREEN4: IC19.3 R89.2
LED_GREEN5: IC23.3 R107.2
LED_GREEN6: IC27.3 R125.2
LED_GREEN7: IC31.3 R143.2
LED_GREEN8: IC35.3 R161.2
LED_GREEN9: IC39.3 R179.2
LED_ORANGE: IC3.2 R7.2
LED_ORANGE1: IC7.2 R25.2
LED_ORANGE2: IC11.2 R51.2
LED_ORANGE3: IC15.2 R69.2
LED_ORANGE4: IC19.2 R90.2
LED_ORANGE5: IC23.2 R108.2
LED_ORANGE6: IC27.2 R126.2
LED_ORANGE7: IC31.2 R144.2
LED_ORANGE8: IC35.2 R162.2
LED_ORANGE9: IC39.2 R180.2
N$1: J3.4 R5.2
N$2: C31.1 R34.2 T2.1
N$3: LED3.A R7.1
N$4: LED2.A R6.1
N$5: R34.1 R35.2 R38.1 T2.3
N$6: C3.1 IC1.3
N$7: C1.2 IC1.2
N$8: C1.1 IC1.1
N$9: C3.2 IC1.4
N$10: LED1.C R76.2
N$11: C11.2 IC3.38 Q1.1
N$12: IC1.8 R2.1
N$13: C8.2 IC3.37 Q1.3
N$14: IC4.7 R8.1
N$15: IC4.6 R9.1
N$16: C14.1 D1.1 J7.3 R9.2
N$17: C15.1 D1.2 J7.2 R8.2
N$18: LED4.C R10.2
N$19: C20.2 R13.1 T3.2
N$20: C20.1 R14.2 T4.1
N$21: R14.1 R15.2 R18.1 T4.3
N$22: C21.1 R16.2 R17.1 R20.1
N$23: C21.2 R18.2 R19.1
N$24: C24.1 IC8.3
N$25: C23.2 IC8.2
N$26: C23.1 IC8.1
N$27: C24.2 IC8.4
N$28: IC8.8 R21.1
N$29: C35.2 IC7.38 Q2.1
N$30: C29.2 IC7.37 Q2.3
N$31: J8.4 R23.2
N$32: LED6.A R25.1
N$33: LED5.A R24.1
N$34: IC9.7 R26.1
N$35: C31.2 R33.1 T1.2
N$36: IC9.6 R27.1
N$37: C38.1 D2.1 J9.3 R27.2
N$38: C39.1 D2.2 J9.2 R26.2
N$39: IC5.7 R75.1
N$40: IC5.6 R74.1
N$41: LED7.C R28.2
N$42: C30.1 R36.2 R37.1 R40.1
N$43: C30.2 R38.2 R39.1
N$44: C44.2 R31.1 T5.2
N$45: C44.1 R32.2 T6.1
N$46: R32.1 R41.2 R44.1 T6.3
N$47: C45.1 R42.2 R43.1 R46.1
N$48: C45.2 R44.2 R45.1
N$49: C48.1 IC12.3
N$50: C47.2 IC12.2
N$51: C47.1 IC12.1
N$52: C48.2 IC12.4
N$53: IC12.8 R47.1
N$54: C56.2 IC11.38 Q3.1
N$55: C53.2 IC11.37 Q3.3
N$56: J10.4 R49.2
N$57: LED9.A R51.1
N$58: LED8.A R50.1
N$59: IC13.7 R52.1
N$60: IC13.6 R53.1
N$61: C59.1 D3.1 J11.3 R53.2
N$62: C60.1 D3.2 J11.2 R52.2
N$63: LED10.C R54.2
N$64: C65.2 R57.1 T7.2
N$65: C65.1 R58.2 T8.1
N$66: R58.1 R59.2 R62.1 T8.3
N$67: C66.1 R60.2 R61.1 R64.1
N$68: C66.2 R62.2 R63.1
N$69: C69.1 IC16.3
N$70: C68.2 IC16.2
N$71: C68.1 IC16.1
N$72: C69.2 IC16.4
N$73: IC16.8 R65.1
N$74: C77.2 IC15.38 Q4.1
N$75: C91.1 D23.1 J1.3 R74.2
N$76: C90.1 D23.2 J1.2 R75.2
N$77: C74.2 IC15.37 Q4.3
N$78: J12.4 R67.2
N$79: LED12.A R69.1
N$80: LED11.A R68.1
N$81: IC17.7 R70.1
N$82: IC17.6 R71.1
N$83: C80.1 D4.1 J13.3 R71.2
N$84: C81.1 D4.2 J13.2 R70.2
N$85: LED13.C R72.2
N$86: C86.2 R78.1 T9.2
N$87: C86.1 R79.2 T10.1
N$88: R79.1 R80.2 R83.1 T10.3
N$89: C87.1 R81.2 R82.1 R85.1
N$90: C87.2 R83.2 R84.1
N$91: C95.1 IC20.3
N$92: C89.2 IC20.2
N$93: C89.1 IC20.1
N$94: C95.2 IC20.4
N$95: IC20.8 R86.1
N$96: C103.2 IC19.38 Q5.1
N$97: C100.2 IC19.37 Q5.3
N$98: J14.4 R88.2
N$99: LED15.A R90.1
N$100: LED14.A R89.1
N$101: IC21.7 R91.1
N$102: IC21.6 R92.1
N$103: C106.1 D5.1 J15.3 R92.2
N$104: C107.1 D5.2 J15.2 R91.2
N$105: LED16.C R93.2
N$106: C112.2 R96.1 T11.2
N$107: C112.1 R97.2 T12.1
N$108: R97.1 R98.2 R101.1 T12.3
N$109: C113.1 R99.2 R100.1 R103.1
N$110: C113.2 R101.2 R102.1
N$111: C116.1 IC24.3
N$112: C115.2 IC24.2
N$113: C115.1 IC24.1
N$114: C116.2 IC24.4
N$115: IC24.8 R104.1
N$116: C124.2 IC23.38 Q6.1
N$117: C121.2 IC23.37 Q6.3
N$118: J16.4 R106.2
N$119: LED18.A R108.1
N$120: LED17.A R107.1
N$121: IC25.7 R109.1
N$122: IC25.6 R110.1
N$123: C127.1 D6.1 J17.3 R110.2
N$124: C128.1 D6.2 J17.2 R109.2
N$125: LED19.C R111.2
N$126: C133.2 R114.1 T13.2
N$127: C133.1 R115.2 T14.1
N$128: R115.1 R116.2 R119.1 T14.3
N$129: C134.1 R117.2 R118.1 R121.1
N$130: C134.2 R119.2 R120.1
N$131: C137.1 IC28.3
N$132: C136.2 IC28.2
N$133: C136.1 IC28.1
N$134: C137.2 IC28.4
N$135: IC28.8 R122.1
N$136: C145.2 IC27.38 Q7.1
N$137: C142.2 IC27.37 Q7.3
N$138: J18.4 R124.2
N$139: LED21.A R126.1
N$140: LED20.A R125.1
N$141: IC29.7 R127.1
N$142: IC29.6 R128.1
N$143: C148.1 D7.1 J19.3 R128.2
N$144: C149.1 D7.2 J19.2 R127.2
N$145: LED22.C R129.2
N$146: C154.2 R132.1 T15.2
N$147: C154.1 R133.2 T16.1
N$148: R133.1 R134.2 R137.1 T16.3
N$149: C155.1 R135.2 R136.1 R139.1
N$150: C155.2 R137.2 R138.1
N$151: C158.1 IC32.3
N$152: C157.2 IC32.2
N$153: C157.1 IC32.1
N$154: C158.2 IC32.4
N$155: IC32.8 R140.1
N$156: C166.2 IC31.38 Q8.1
N$157: C163.2 IC31.37 Q8.3
N$158: J20.4 R142.2
N$159: LED24.A R144.1
N$160: LED23.A R143.1
N$161: IC33.7 R145.1
N$162: IC33.6 R146.1
N$163: C169.1 D8.1 J21.3 R146.2
N$164: C170.1 D8.2 J21.2 R145.2
N$165: LED25.C R147.2
N$166: C175.2 R150.1 T17.2
N$167: C175.1 R151.2 T18.1
N$168: R151.1 R152.2 R155.1 T18.3
N$169: C176.1 R153.2 R154.1 R157.1
N$170: C176.2 R155.2 R156.1
N$171: C179.1 IC36.3
N$172: C178.2 IC36.2
N$173: C178.1 IC36.1
N$174: C179.2 IC36.4
N$175: IC36.8 R158.1
N$176: C187.2 IC35.38 Q9.1
N$177: C184.2 IC35.37 Q9.3
N$178: J22.4 R160.2
N$179: LED27.A R162.1
N$180: LED26.A R161.1
N$181: IC37.7 R163.1
N$182: IC37.6 R164.1
N$183: C190.1 D9.1 J23.3 R164.2
N$184: C191.1 D9.2 J23.2 R163.2
N$185: LED28.C R165.2
N$186: C196.2 R168.1 T19.2
N$187: C196.1 R169.2 T20.1
N$188: R169.1 R170.2 R173.1 T20.3
N$189: C197.1 R171.2 R172.1 R175.1
N$190: C197.2 R173.2 R174.1
N$191: C200.1 IC40.3
N$192: C199.2 IC40.2
N$193: C199.1 IC40.1
N$194: C200.2 IC40.4
N$195: IC40.8 R176.1
N$196: C208.2 IC39.38 Q10.1
N$197: C205.2 IC39.37 Q10.3
N$198: J24.4 R178.2
N$199: LED30.A R180.1
N$200: LED29.A R179.1
NOISE: C32.1 IC3.1 R40.2
NOISE1: C22.1 IC7.1 R20.2
NOISE2: C46.1 IC11.1 R46.2
NOISE3: C67.1 IC15.1 R64.2
NOISE4: C88.1 IC19.1 R85.2
NOISE5: C114.1 IC23.1 R103.2
NOISE6: C135.1 IC27.1 R121.2
NOISE7: C156.1 IC31.1 R139.2
NOISE8: C177.1 IC35.1 R157.2
NOISE9: C198.1 IC39.1 R175.2
PE: J2.3 J4.1 J4.6
RESET#: IC3.20 J3.2
RESET#1: IC7.20 J8.2
RESET#2: IC11.20 J10.2
RESET#3: IC15.20 J12.2
RESET#4: IC19.20 J14.2
RESET#5: IC23.20 J16.2
RESET#6: IC27.20 J18.2
RESET#7: IC31.20 J20.2
RESET#8: IC35.20 J22.2
RESET#9: IC39.20 J24.2
RXD_L_TXD_R: J5.3 J6.3
SCL: IC2.6 IC3.29 R4.2
SCL1: IC6.6 IC7.29 R12.2
SCL2: IC10.6 IC11.29 R30.2
SCL3: IC14.6 IC15.29 R56.2
SCL4: IC18.6 IC19.29 R77.2
SCL5: IC22.6 IC23.29 R95.2
SCL6: IC26.6 IC27.29 R113.2
SCL7: IC30.6 IC31.29 R131.2
SCL8: IC34.6 IC35.29 R149.2
SCL9: IC38.6 IC39.29 R167.2
SDA: IC2.5 IC3.28 R1.2
SDA1: IC6.5 IC7.28 R11.2
SDA2: IC10.5 IC11.28 R29.2
SDA3: IC14.5 IC15.28 R55.2
SDA4: IC18.5 IC19.28 R73.2
SDA5: IC22.5 IC23.28 R94.2
SDA6: IC26.5 IC27.28 R112.2
SDA7: IC30.5 IC31.28 R130.2
SDA8: IC34.5 IC35.28 R148.2
SDA9: IC38.5 IC39.28 R166.2
TEST: IC3.19 J3.3
TEST1: IC7.19 J8.3
TEST2: IC11.19 J10.3
TEST3: IC15.19 J12.3
TEST4: IC19.19 J14.3
TEST5: IC23.19 J16.3
TEST6: IC27.19 J18.3
TEST7: IC31.19 J20.3
TEST8: IC35.19 J22.3
TEST9: IC39.19 J24.3
TXD_R_RXD_L: J5.2 J6.2
USB_SHLD: C9.2 J1.SH1 J1.SH2 R3.2
USB_SHLD1: C36.2 J7.SH1 J7.SH2 R22.2
USB_SHLD2: C57.2 J9.SH1 J9.SH2 R48.2
USB_SHLD3: C78.2 J11.SH1 J11.SH2 R66.2
USB_SHLD4: C104.2 J13.SH1 J13.SH2 R87.2
USB_SHLD5: C125.2 J15.SH1 J15.SH2 R105.2
USB_SHLD6: C146.2 J17.SH1 J17.SH2 R123.2
USB_SHLD7: C167.2 J19.SH1 J19.SH2 R141.2
USB_SHLD8: C188.2 J21.SH1 J21.SH2 R159.2
USB_SHLD9: C209.2 J23.SH1 J23.SH2 R177.2
USB_SLEEP#: IC3.33 IC5.14
USB_SLEEP#1: IC4.14 IC7.33
USB_SLEEP#2: IC9.14 IC11.33
USB_SLEEP#3: IC13.14 IC15.33
USB_SLEEP#4: IC17.14 IC19.33
USB_SLEEP#5: IC21.14 IC23.33
USB_SLEEP#6: IC25.14 IC27.33
USB_SLEEP#7: IC29.14 IC31.33
USB_SLEEP#8: IC33.14 IC35.33
USB_SLEEP#9: IC37.14 IC39.33

## Tracks (layer width: path | path; a pad name or v marks a point on that pad's centre or on a via)
0V
  pour Bottom (isolate 0.3): 24.8,72.9 24.5,72.6 10.5,72.6 10.1,73 10.1,79.2 10.4,79.5 11.5,79.5 15.6,83.6 15.6,86.5 15.9,86.8 24.5,86.8 24.8,86.5
+3V3_FTDI  (via drill 0.2 pad 0.45)
  Top 0.15: 10.5,5.8 10.57,5.88 12.72,5.88 12.75,5.85
  Top 0.2: LED1.A 9.7,13 11,13 11.8,13.8 13.5,13.8 v13.7,13.6 | 12.75,5.85 13.1,5.5
  Top 0.25: IC3.32 17.2,5.35 16.7,4.85 v16.7,4.7 16.2,4.7 C10.1 | C12.1 22.6,5.3 22.4,5.5 21.4,5.5 21.2,5.7 IC3.40
  Top 0.3: IC5.8 8.91,6.23 v8.3,5.9 | 10.3,5.1 IC5.9 10.42,5.73 10.5,5.8 | IC5.1 12.38,9.97 12.8,10.4 C94.1 v13.07,9.7
  Top 0.45: R5.1 v23.5,2.2 23.5,4 22.6,4.9 C12.1
  Top 0.5: v8.3,5.9 C93.1 10.3,5.1 | 13.1,5.5 v13.2,3.4
  Bottom 0.125: IC2.8 16.7,13.5 16.82,13.38 16.82,11.62 16.8,11.6
  Bottom 0.2: v13.7,13.6 13.8,13.5 C2.1
  Bottom 0.25: C2.1 15.5,13.5 IC2.8 | v13.07,9.7 13.5,9.6 13.7,9.3 13.9,8.8 14.9,7.9 15.3,7.9 16.2,8.8 R4.1 R1.1 16.8,11.6
  Bottom 0.3: 12.5,8.6 12.8,9.4 v13.07,9.7
  Bottom 0.45: v23.5,2.2 22.4,1.1 17.7,1.1 17.4,1.4 17,2.5 16.4,3.1 16.4,3.6 16,4 v16.7,4.7 16.9,4.9 R36.1
  Bottom 0.5: v8.3,5.9 9.9,8.1 10.2,8.3 12.2,8.3 12.5,8.6 | v13.2,3.4 13.55,3.5 14.05,4 16,4
+3V3_FTDI1  (via drill 0.2 pad 0.45)
  Top 0.15: 10.5,20.2 10.57,20.27 12.72,20.27 12.75,20.25
  Top 0.2: LED4.A 9.7,27.4 11,27.4 11.8,28.2 13.5,28.2 v13.7,28 | 12.75,20.25 13.1,19.9
  Top 0.25: IC7.32 17.2,19.75 16.7,19.25 v16.7,19.1 16.2,19.1 C34.1 | C33.1 22.6,19.7 22.4,19.9 21.4,19.9 21.2,20.1 IC7.40
  Top 0.3: IC4.8 8.91,20.62 v8.3,20.3 | 10.3,19.5 IC4.9 10.42,20.12 10.5,20.2 | IC4.1 12.38,24.38 12.8,24.8 C18.1 v13.07,24.1
  Top 0.45: R23.1 v23.5,16.6 23.5,18.4 22.6,19.3 C33.1
  Top 0.5: v8.3,20.3 C17.1 10.3,19.5 | 13.1,19.9 v13.2,17.8
  Bottom 0.125: IC6.8 16.7,27.9 16.82,27.77 16.82,26.02 16.8,26
  Bottom 0.2: v13.7,28 13.8,27.9 C19.1
  Bottom 0.25: C19.1 15.5,27.9 IC6.8 | v13.07,24.1 13.5,24 13.7,23.7 13.9,23.2 14.9,22.3 15.3,22.3 16.2,23.2 R12.1 R11.1 16.8,26
  Bottom 0.3: 12.5,23 12.8,23.8 v13.07,24.1
  Bottom 0.45: v23.5,16.6 22.4,15.5 17.7,15.5 17.4,15.8 17,16.9 16.4,17.5 16.4,18 16,18.4 v16.7,19.1 16.9,19.3 R16.1
  Bottom 0.5: v8.3,20.3 9.9,22.5 10.2,22.7 12.2,22.7 12.5,23 | v13.2,17.8 13.55,17.9 14.05,18.4 16,18.4
+3V3_FTDI2  (via drill 0.2 pad 0.45)
  Top 0.15: 10.5,34.6 10.57,34.68 12.72,34.68 12.75,34.65
  Top 0.2: LED7.A 9.7,41.8 11,41.8 11.8,42.6 13.5,42.6 v13.7,42.4 | 12.75,34.65 13.1,34.3
  Top 0.25: IC11.32 17.2,34.15 16.7,33.65 v16.7,33.5 16.2,33.5 C55.1 | C54.1 22.6,34.1 22.4,34.3 21.4,34.3 21.2,34.5 IC11.40
  Top 0.3: IC9.8 8.91,35.03 v8.3,34.7 | 10.3,33.9 IC9.9 10.42,34.53 10.5,34.6 | IC9.1 12.38,38.78 12.8,39.2 C42.1 v13.07,38.5
  Top 0.45: R49.1 v23.5,31 23.5,32.8 22.6,33.7 C54.1
  Top 0.5: v8.3,34.7 C41.1 10.3,33.9 | 13.1,34.3 v13.2,32.2
  Bottom 0.125: IC10.8 16.7,42.3 16.82,42.18 16.82,40.43 16.8,40.4
  Bottom 0.2: v13.7,42.4 13.8,42.3 C43.1
  Bottom 0.25: C43.1 15.5,42.3 IC10.8 | v13.07,38.5 13.5,38.4 13.7,38.1 13.9,37.6 14.9,36.7 15.3,36.7 16.2,37.6 R30.1 R29.1 16.8,40.4
  Bottom 0.3: 12.5,37.4 12.8,38.2 v13.07,38.5
  Bottom 0.45: v23.5,31 22.4,29.9 17.7,29.9 17.4,30.2 17,31.3 16.4,31.9 16.4,32.4 16,32.8 v16.7,33.5 16.9,33.7 R42.1
  Bottom 0.5: v8.3,34.7 9.9,36.9 10.2,37.1 12.2,37.1 12.5,37.4 | v13.2,32.2 13.55,32.3 14.05,32.8 16,32.8
+3V3_FTDI3  (via drill 0.2 pad 0.45)
  Top 0.15: 10.5,49 10.57,49.08 12.72,49.08 12.75,49.05
  Top 0.2: LED10.A 9.7,56.2 11,56.2 11.8,57 13.5,57 v13.7,56.8 | 12.75,49.05 13.1,48.7
  Top 0.25: IC15.32 17.2,48.55 16.7,48.05 v16.7,47.9 16.2,47.9 C76.1 | C75.1 22.6,48.5 22.4,48.7 21.4,48.7 21.2,48.9 IC15.40
  Top 0.3: IC13.8 8.91,49.43 v8.3,49.1 | 10.3,48.3 IC13.9 10.42,48.93 10.5,49 | IC13.1 12.38,53.18 12.8,53.6 C63.1 v13.07,52.9
  Top 0.45: R67.1 v23.5,45.4 23.5,47.2 22.6,48.1 C75.1
  Top 0.5: v8.3,49.1 C62.1 10.3,48.3 | 13.1,48.7 v13.2,46.6
  Bottom 0.125: IC14.8 16.7,56.7 16.82,56.58 16.82,54.83 16.8,54.8
  Bottom 0.2: v13.7,56.8 13.8,56.7 C64.1
  Bottom 0.25: C64.1 15.5,56.7 IC14.8 | v13.07,52.9 13.5,52.8 13.7,52.5 13.9,52 14.9,51.1 15.3,51.1 16.2,52 R56.1 R55.1 16.8,54.8
  Bottom 0.3: 12.5,51.8 12.8,52.6 v13.07,52.9
  Bottom 0.45: v23.5,45.4 22.4,44.3 17.7,44.3 17.4,44.6 17,45.7 16.4,46.3 16.4,46.8 16,47.2 v16.7,47.9 16.9,48.1 R60.1
  Bottom 0.5: v8.3,49.1 9.9,51.3 10.2,51.5 12.2,51.5 12.5,51.8 | v13.2,46.6 13.55,46.7 14.05,47.2 16,47.2
+3V3_FTDI4  (via drill 0.2 pad 0.45)
  Top 0.15: 10.5,63.4 10.57,63.48 12.72,63.48 12.75,63.45
  Top 0.2: LED13.A 9.7,70.6 11,70.6 11.8,71.4 13.5,71.4 v13.7,71.2 | 12.75,63.45 13.1,63.1
  Top 0.25: IC19.32 17.2,62.95 16.7,62.45 v16.7,62.3 16.2,62.3 C102.1 | C101.1 22.6,62.9 22.4,63.1 21.4,63.1 21.2,63.3 IC19.40
  Top 0.3: IC17.8 8.91,63.83 v8.3,63.5 | 10.3,62.7 IC17.9 10.42,63.33 10.5,63.4 | IC17.1 12.38,67.58 12.8,68 C84.1 v13.07,67.3
  Top 0.45: R88.1 v23.5,59.8 23.5,61.6 22.6,62.5 C101.1
  Top 0.5: v8.3,63.5 C83.1 10.3,62.7 | 13.1,63.1 v13.2,61
  Bottom 0.125: IC18.8 16.7,71.1 16.82,70.98 16.82,69.23 16.8,69.2
  Bottom 0.2: v13.7,71.2 13.8,71.1 C85.1
  Bottom 0.25: C85.1 15.5,71.1 IC18.8 | v13.07,67.3 13.5,67.2 13.7,66.9 13.9,66.4 14.9,65.5 15.3,65.5 16.2,66.4 R77.1 R73.1 16.8,69.2
  Bottom 0.3: 12.5,66.2 12.8,67 v13.07,67.3
  Bottom 0.45: v23.5,59.8 22.4,58.7 17.7,58.7 17.4,59 17,60.1 16.4,60.7 16.4,61.2 16,61.6 v16.7,62.3 16.9,62.5 R81.1
  Bottom 0.5: v8.3,63.5 9.9,65.7 10.2,65.9 12.2,65.9 12.5,66.2 | v13.2,61 13.55,61.1 14.05,61.6 16,61.6
+3V3_FTDI5  (via drill 0.2 pad 0.45)
  Top 0.15: 35.9,5.8 35.98,5.88 38.12,5.88 38.15,5.85
  Top 0.2: LED16.A 35.1,13 36.4,13 37.2,13.8 38.9,13.8 v39.1,13.6 | 38.15,5.85 38.5,5.5
  Top 0.25: IC23.32 42.6,5.35 42.1,4.85 v42.1,4.7 41.6,4.7 C123.1 | C122.1 48,5.3 47.8,5.5 46.8,5.5 46.6,5.7 IC23.40
  Top 0.3: IC21.8 34.32,6.23 v33.7,5.9 | 35.7,5.1 IC21.9 35.83,5.73 35.9,5.8 | IC21.1 37.78,9.97 38.2,10.4 C110.1 v38.48,9.7
  Top 0.45: R106.1 v48.9,2.2 48.9,4 48,4.9 C122.1
  Top 0.5: v33.7,5.9 C109.1 35.7,5.1 | 38.5,5.5 v38.6,3.4
  Bottom 0.125: IC22.8 42.1,13.5 42.23,13.38 42.23,11.62 42.2,11.6
  Bottom 0.2: v39.1,13.6 39.2,13.5 C111.1
  Bottom 0.25: C111.1 40.9,13.5 IC22.8 | v38.48,9.7 38.9,9.6 39.1,9.3 39.3,8.8 40.3,7.9 40.7,7.9 41.6,8.8 R95.1 R94.1 42.2,11.6
  Bottom 0.3: 37.9,8.6 38.2,9.4 v38.48,9.7
  Bottom 0.45: v48.9,2.2 47.8,1.1 43.1,1.1 42.8,1.4 42.4,2.5 41.8,3.1 41.8,3.6 41.4,4 v42.1,4.7 42.3,4.9 R99.1
  Bottom 0.5: v33.7,5.9 35.3,8.1 35.6,8.3 37.6,8.3 37.9,8.6 | v38.6,3.4 38.95,3.5 39.45,4 41.4,4
+3V3_FTDI6  (via drill 0.2 pad 0.45)
  Top 0.15: 35.9,20.2 35.98,20.27 38.12,20.27 38.15,20.25
  Top 0.2: LED19.A 35.1,27.4 36.4,27.4 37.2,28.2 38.9,28.2 v39.1,28 | 38.15,20.25 38.5,19.9
  Top 0.25: IC27.32 42.6,19.75 42.1,19.25 v42.1,19.1 41.6,19.1 C144.1 | C143.1 48,19.7 47.8,19.9 46.8,19.9 46.6,20.1 IC27.40
  Top 0.3: IC25.8 34.32,20.62 v33.7,20.3 | 35.7,19.5 IC25.9 35.83,20.12 35.9,20.2 | IC25.1 37.78,24.38 38.2,24.8 C131.1 v38.48,24.1
  Top 0.45: R124.1 v48.9,16.6 48.9,18.4 48,19.3 C143.1
  Top 0.5: v33.7,20.3 C130.1 35.7,19.5 | 38.5,19.9 v38.6,17.8
  Bottom 0.125: IC26.8 42.1,27.9 42.23,27.77 42.23,26.02 42.2,26
  Bottom 0.2: v39.1,28 39.2,27.9 C132.1
  Bottom 0.25: C132.1 40.9,27.9 IC26.8 | v38.48,24.1 38.9,24 39.1,23.7 39.3,23.2 40.3,22.3 40.7,22.3 41.6,23.2 R113.1 R112.1 42.2,26
  Bottom 0.3: 37.9,23 38.2,23.8 v38.48,24.1
  Bottom 0.45: v48.9,16.6 47.8,15.5 43.1,15.5 42.8,15.8 42.4,16.9 41.8,17.5 41.8,18 41.4,18.4 v42.1,19.1 42.3,19.3 R117.1
  Bottom 0.5: v33.7,20.3 35.3,22.5 35.6,22.7 37.6,22.7 37.9,23 | v38.6,17.8 38.95,17.9 39.45,18.4 41.4,18.4
+3V3_FTDI7  (via drill 0.2 pad 0.45)
  Top 0.15: 35.9,34.6 35.98,34.68 38.12,34.68 38.15,34.65